# Altium PCB DRV8313EVM.PcbDoc
Units mm, origin at the board's own origin, x right, y up, seen from the top; angles counter-clockwise.
Board outline 56.73 x 32 mm, 2 copper layers (Top Layer, Bottom Layer); 38 components, 35 nets, 159 pads, 138 vias.
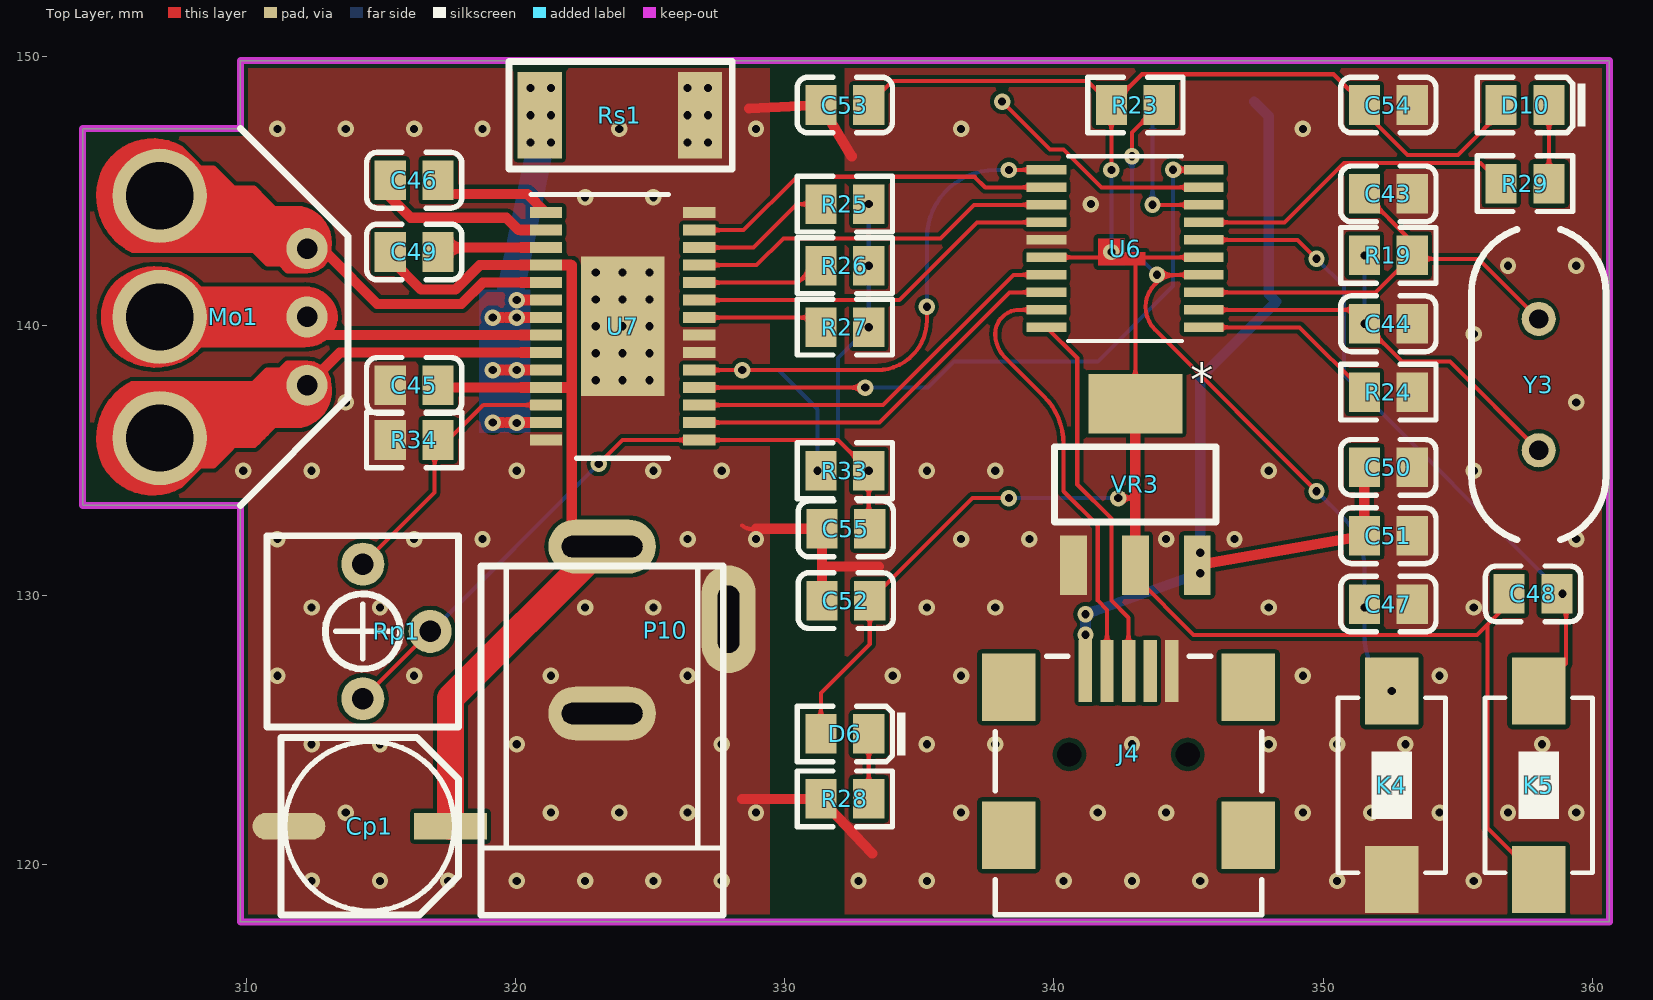
[diagram p0: Top Layer view]
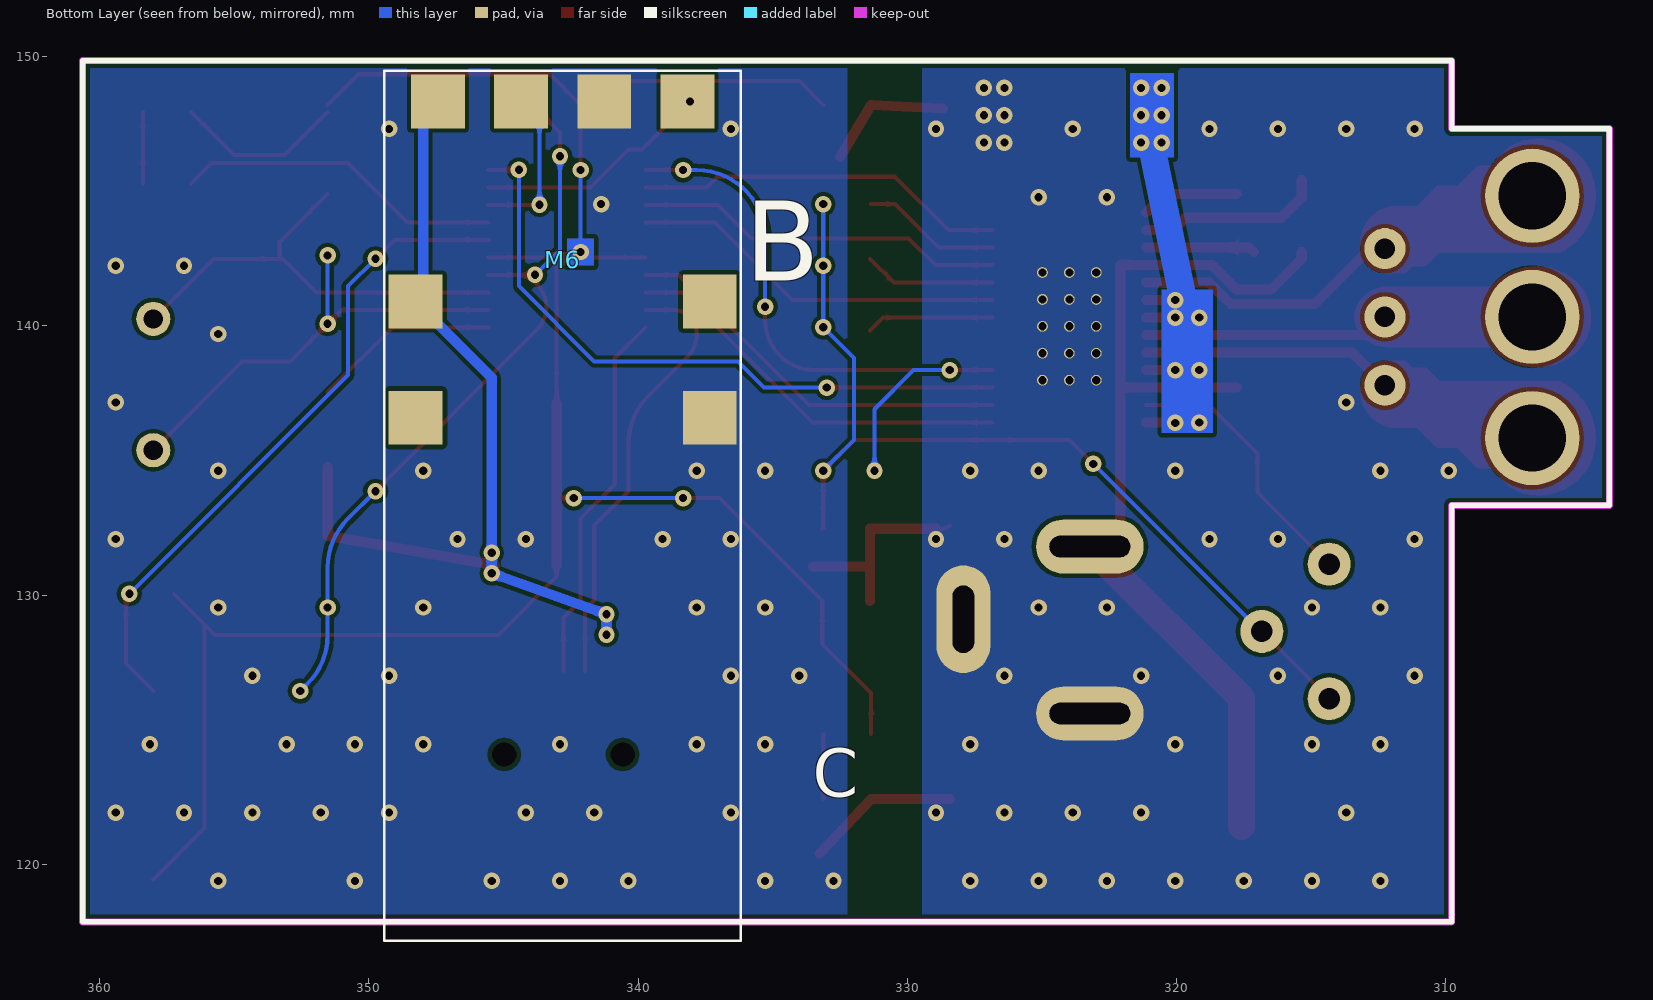
[diagram p1: Bottom Layer view, seen from below]
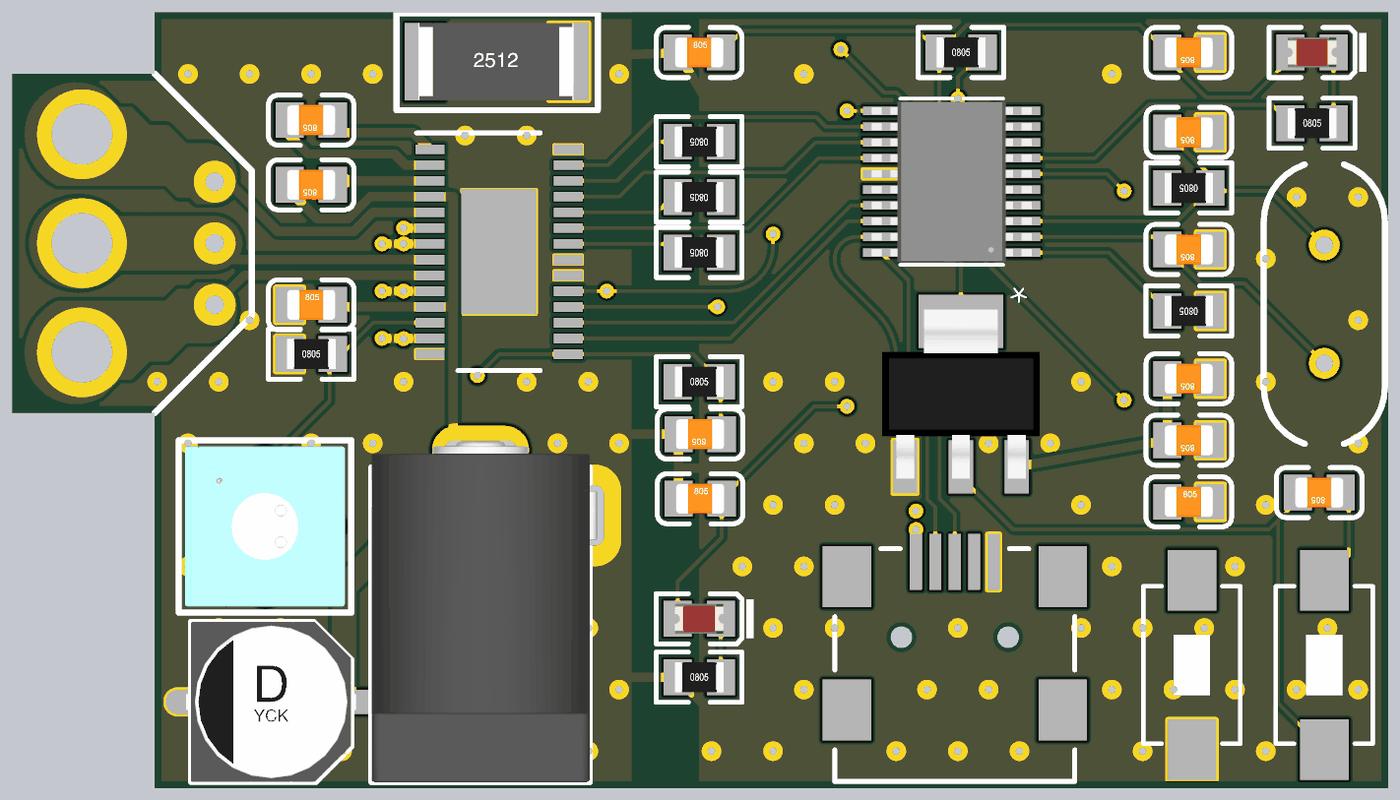
[diagram p2: 3D render of the assembled board from above, using the file's embedded part models]

## Layer stack, top to bottom
Top Solder: solder mask 0.0102, Solder Resist, Dk 3.5
Top Layer: signal copper 0.0356
Dielectric 1: dielectric 0.32, FR-4, Dk 4.8
Bottom Layer: signal copper 0.0356
Bottom Solder: solder mask 0.0102, Solder Resist, Dk 3.5

## Board outline
303.911,133.335 303.911,147.335 309.777,147.335 309.777,149.86 360.64,149.86 360.64,117.856 309.777,117.856 309.777,133.335

## Design rules (kind name [scope] priority, off if disabled: settings)
Clearance [All] p1: gap=0.152 ignorepadtopadclearanceinfootprint=FALSE
HoleSize [All] p1: absolutevalues=TRUE maxlimit=6 minlimit=0.305 maxpercent=80.000 minpercent=20.000
HoleToHoleClearance [All] p1: gap=0.152 allowstackedmicrovias=TRUE
MinimumSolderMaskSliver [All] p1: minsoldermaskwidth=0
PolygonConnect [All] p1: connectstyle=Direct reliefconductorwidth=0.254 reliefentries=4 polygonreliefangle="90 Angle" airgapwidth=0.254
RoutingVias [All] p1: holewidth=0.305 width=0.61 viastyle="Through Hole" minholewidth=0.305 minwidth=0.61 maxholewidth=0.711 maxwidth=1.27
SilkToSilkClearance [All] p1: silktosilkclearance=0
SilkToSolderMaskClearance [IsPad] p1: minsilkscreentomaskgap=0 clearancetoexposedcopper=TRUE
SolderMaskExpansion [All] p1: expansion=0.102
Width [All] p1: maxlimit=254 minlimit=0.152 preferedwidth=0.152
25 further rules are at their usual default settings.

## Components (designator, comment, footprint, x,y, rotation, side; value= is the part's Value field where it differs from the comment)
C43 "9pF" 0805_C 352.425,144.907 r180 top
C44 "9pF" 0805_C 352.425,140.081 r180 top
C45 "10uF" 0805_C 316.23,137.795 r0 top
C46 "10nF" 0805_C 316.23,145.415 r180 top
C47 "100nF" 0805_C 352.425,129.667 r0 top
C48 "100nF" 0805_C 357.803,130.048 r180 top
C49 "100nF" 0805_C 316.23,142.748 r180 top
C50 "100nF" 0805_C 352.425,134.747 r180 top
C51 "10uF" 0805_C 352.425,132.207 r180 top
C52 "10uF" 0805_C 332.269,129.794 r0 top
C53 "100nF" 0805_C 332.232,148.209 r0 top
C54 "100nF" 0805_C 352.425,148.209 r180 top
C55 "470nF" 0805_C 332.269,132.461 r180 top
Cp1 "100u" "CM D(6.3*5.4)" 314.579,121.412 r0 top
D6 "翠绿 0805" 0805_LED_S1 332.232,124.841 r180 top
D10 "红灯 0805" 0805_LED_S1 357.505,148.209 r180 top
J4 "UsbOtg" USB-MINI-A 342.773,124.079 r0 top
K4 "SW" SWITCH 352.552,122.936 r180 top
K5 "SW" SWITCH 358.013,122.936 r180 top
M6 "Pl2303EVM" PI230203EVM 342.86,135.381 r180 bottom locked
Mo1 "Motor3F" Motor_3F 311.277,140.335 r270 top
P10 "Power" DC-005 323.215,125.603 r270 top
R19 "10MΩ" 0805_R 352.425,142.621 r180 top
R23 "100KΩ" 0805_R 343.027,148.209 r0 top
R24 "100KΩ" 0805_R 352.425,137.541 r180 top
R25 "10KΩ" 0805_R 332.232,144.526 r180 top
R26 "10KΩ" 0805_R 332.232,142.24 r180 top
R27 "10KΩ" 0805_R 332.232,139.954 r180 top
R28 "1KΩ" 0805_R 332.232,122.428 r0 top
R29 "1KΩ" 0805_R 357.505,145.288 r0 top
R33 "Pending" 0805_R 332.232,134.62 r0 top
R34 "Pending" 0805_R 316.23,135.763 r0 top
Rp1 "Pending" RP3362P 314.325,128.651 r270 top
Rs1 "0.01R" "R 2512_L" 323.85,147.828 r0 top
U6 "STM32F03xFxP" TSSOP20 342.646,142.875 r180 top locked value=Value
U7 "DRV8313PWPR" PWP0028F_L 323.977,139.986 r0 top value=Value
VR3 "AMS1117-3.3" SOT-223 343.027,134.112 r270 top
Y3 "8MHz" XTAL_US 358.013,140.262 r270 top

## Footprints (in the part's own frame and the unit in brackets; to place one, negate y for a bottom-side part, rotate by r counter-clockwise, add the part's x,y. Pads: shape width x height; smd on the part's side, far side on the other; paste and mask are expansions set on the pad)
0805_C [mm]
  rect 1.16x1.47 smd: 1(-0.89,0) 2(0.89,0)
  silkscreen extent -1.77,-1.04 1.77,1.04, body extent -1,-0.62 1,0.63, height 0.77
0805_LED_S1 [mm]
  rect 1.16x1.47 smd: A(0.89,0) K(-0.89,0)
  silkscreen extent -2.25,-1.03 1.77,1.03, body extent -1.01,-0.62 1.01,0.62, height 1.1
0805_R [mm]
  rect 1.16x1.47 smd: 1(-0.89,0) 2(0.89,0)
  silkscreen extent -1.77,-1.03 1.77,1.03, body extent -1,-0.62 1,0.63, height 0.49
"CM D(6.3*5.4)" [mm] "贴片电解电容，直径6.3mm，高5.4mm"
  rect 2.7x1 smd: 1(3,0)
  oval 2.7x1 smd: 2(-3,0)
  silkscreen extent -3.3,-3.3 3.3,3.3, body extent -3.5,-3.3 3.5,3.3, height 5.4
DC-005 [mm] "5.5*2.1mm，DC30V,2.5A"
  oval 2x4 hole 0.8 slot 3 at 90 deg: 1(-6.2,0) 2(0,0)
  oval 4x2 hole 0.8 slot 2.5 at 0 deg: 2(-3.5,4.7)
  silkscreen extent -5.48,-4.5 7.5,4.5, body extent -6.55,-4.5 7.5,4.8, height 11.2
Motor_3F [mm]
  round 3.5 hole 2.5: 1(-4.5,-4.5) 2(0,-4.5) 3(4.5,-4.5)
  round 1.524 hole 0.762: 1(-2.54,0.975) 2(0,0.975) 3(2.538,0.975)
  Top Layer drawing of 741 lines, arcs and shapes, not listed
  Keep-Out Layer lines w0.254: 7,-1.5 7,-7.366 -7,-7.366 -7,-1.5
  silkscreen extent -7,-1.5 7,2.5
PI230203EVM [mm]
  rect 2x2 smd: 0(-5.405,1.206) 0(5.52,5.524) 1(-5.405,5.524) 1(-4.578,12.955) 2(1.603,12.955) 2(5.52,1.206) 3(4.693,12.955) 4(-1.488,12.955)
  Top Overlay keep-out lines w0.102: 6.675,-18.225 6.675,14.1 -6.575,14.1 -6.575,-18.225 6.675,-18.225
  silkscreen extent -6.58,-18.22 6.67,14.1, body extent -6,-18.28 6.12,13.62, height 1
PWP0028F_L [mm]
  rect 1.2x0.4 smd paste+0 mask+0.051: 1(-2.85,4.225) 2(-2.85,3.575) 3(-2.85,2.925) 4(-2.85,2.275) 5(-2.85,1.625) 6(-2.85,0.975) 7(-2.85,0.325) 8(-2.85,-0.325) 9(-2.85,-0.975) 10(-2.85,-1.625) 11(-2.85,-2.275) 12(-2.85,-2.925) 13(-2.85,-3.575) 14(-2.85,-4.225) 15(2.85,-4.225) 16(2.85,-3.575) 17(2.85,-2.925) 18(2.85,-2.275) 19(2.85,-1.625) 20(2.85,-0.975) 21(2.85,-0.325) 22(2.85,0.325) 23(2.85,0.975) 24(2.85,1.625) 25(2.85,2.275) 26(2.85,2.925) 27(2.85,3.575) 28(2.85,4.225)
  rect 3.1x5.18 smd paste+0 mask+0.051: 29(0,0)
  round 0.4 / inner round 1.524 / far side round 0.4 hole 0.305 mask+0.051: V(-1,-2) V(-1,-1) V(-1,0) V(-1,1) V(-1,2) V(0,-2) V(0,-1) V(0,0) V(0,1) V(0,2) V(1,-2) V(1,-1) V(1,0) V(1,1) V(1,2)
  silkscreen extent -3.4,-4.9 1.7,4.9, body extent 0,0 0.25,0.25, height 0.25
"R 2512_L" [mm] "1W贴片电阻"
  rect 1.65x3.2 smd: 1(-2.95,0) 2(3,0)
  silkscreen extent -4.1,-2 4.2,2, body extent -3.2,-1.6 3.2,1.6, height 0.55
RP3362P [mm]
  round 1.6 hole 0.8: 1(-2.5,0) 2(0,2.5) 3(2.5,0)
  silkscreen extent -3.56,-3.56 3.56,3.56, body extent -3.3,-3.3 3.3,3.3, height 4.74
SOT-223 [mm]
  rect 2.2x1 smd: 1(3,-2.3) 2(3,0) 3(3,2.3)
  rect 2.2x3.5 smd: 2(-3,0)
  silkscreen extent -1.4,-3 1.4,3, body extent -3.49,-3.24 3.49,3.24, height 1.64
SWITCH [mm]
  rect 2x2.5 smd: 1(0,3.5) 2(0,-3.5)
  silkscreen extent -2,-3.25 2,3.25, body extent -2.03,-3.23 2.03,3.25, height 1.2
TSSOP20 [mil]
  rect 58x14 smd: 1(-115,115.16) 2(-115,89.57) 3(-115,63.98) 4(-115,38.39) 5(-115,12.8) 6(-115,-12.8) 7(-115,-38.39) 8(-115,-63.98) 9(-115,-89.57) 10(-115,-115.16) 11(115,-115.16) 12(115,-89.57) 13(115,-63.98) 14(115,-38.39) 15(115,-12.8) 16(115,12.8) 17(115,38.39) 18(115,63.98) 19(115,89.57) 20(115,115.16)
  silkscreen extent -83,-135 83,135, body extent -130,-130 130,130, height 47
USB-MINI-A [mm] "MINI型USB，7.9*7.5*4.1mm"
  rect 2x2.5 smd: 0(-4.45,-3) 0(-4.45,2.5) 0(4.45,-3) 0(4.45,2.5)
  rect 0.5x2.3 smd: 1(-1.6,3.108) 2(-0.8,3.108) 3(0,3.108) 4(0.8,3.108) 5(1.6,3.108)
  round 0.6 hole 0.9 unplated: MH1(2.2,0) MH2(-2.2,0)
  silkscreen extent -4.95,-5.95 4.95,3.65, body extent -4.75,-6 4.75,3.7, height 3.95
XTAL_US [mil]
  round 50 hole 28: 1(0,0) 2(192.13,0)
  silkscreen extent -131,-98 323,98

## Part data
C43 C44 C45 C46 C47 C48 C49 C53 C54 C55: library part "0805 10nF (103) 10% 50V", "贴片电容", Package=0805, SuppliersPartNumber=C1710, ComponentLink1Description=供应商链接, ComponentLink1URL=http://www.szlcsc.com/product/details_2062.html, Supplier=LC
C50 C51 C52: library part "0805 10uF (106) 10% 25V", "贴片电容", Package=0805, SuppliersPartNumber=C15850, ComponentLink1Description=供应商链接, ComponentLink1URL=http://www.szlcsc.com/product/details_16532.html, Supplier=LC
Cp1: library part Cp, "Polarized Capacitor (Axial)", LatestRevisionDate=17-Jul-2002, LatestRevisionNote="Re-released for DXP Platform.", PackageDescription="Polarized Capacitor; 2 Leads", PackageReference=POLAR0.8, Published=8-Jun-2000, Publisher="Altium Limited"
D6: library part "0805 翠绿", "发光二极管", Package=0805, SuppliersPartNumber=C2297, ComponentLink1Description=供应商链接, ComponentLink1URL=http://www.szlcsc.com/product/details_2670.html, Supplier=LC
D10: library part "0805 红灯", "发光二极管", Package=0805, SuppliersPartNumber=C2295, ComponentLink1Description=供应商链接, ComponentLink1URL=http://www.szlcsc.com/product/details_2668.html, Supplier=LC
K4 K5: "Switch"
R19 R23 R24 R25 R26 R27 R28 R29 R33 R34: library part "0805 10KΩ (1002) 1%", "贴片电阻", Package=0805, SuppliersPartNumber=C17414, ComponentLink1Description=供应商链接, ComponentLink1URL=http://www.szlcsc.com/product/details_18102.html, Supplier=LC
Rp1: library part Rp, "Potentiometer", LatestRevisionDate=17-Jul-2002, LatestRevisionNote="Re-released for DXP Platform.", PackageDescription="Variable Resistor, Thru-Hole; 3 Leads", PackageReference=VR5, Published=8-Jun-2000, Publisher="Altium Limited", Set Position=0.5, Sim Note="Enter the Resistance value and the set point into parameter fields."
Rs1: library part Rs
U6: "Mcu", Manufacturer_Part_Number=stm32f03xfxp, C="Copyright (C) 2016 Accelerated Designs. All rights reserved", Copyright="Copyright (C) 2016 Accelerated Designs. All rights reserved", RefDes=RefDes, Type=Type, Vendor=STMicroelectronics
U7: "Imported", Manufacturer="Texas Instruments", PartNumber=DRV8313PWPR, RefDes=RefDes, Type=TYPE
VR3: library part "SOT-223 AMS1117-3.3", "低压差线性稳压(LDO)", Package=SOT-223, SuppliersPartNumber=C6186, ComponentLink1Description=供应商链接, ComponentLink1URL=http://www.szlcsc.com/product/details_6652.html, Supplier=LC
Y3: library part XTAL, "Crystal Oscillator", LatestRevisionDate=17-Jul-2002, LatestRevisionNote="Re-released for DXP Platform.", Published=8-Jun-2000, Publisher="Altium Limited"

## Via types
v1: diameter 0.61, hole 0.305, Top Layer to Bottom Layer, 138 vias

## Nets (pads, with @x,y where several pads share a name; then routed paths per layer and width w, separated by ;. In a path a pad name is that pad's centre, name@x,y a point inside that pad or via, vN(x,y) a via of type N, cw(c..) or ccw(c..) an arc to the next point about the centre after c; other vN are vias at no path point)
A1: R29.1 U6.7 | length 12.3
  Top Layer w0.152: U6.7 348.574,143.85 350.774,146.05 355.853,146.05 R29.1
A4: U6.10 U7.18 | length 24.6
  Top Layer w0.152: U7.18 v1(332.994,137.711) ; v1(344.428,145.8) U6.10
  Bottom Layer w0.152: v1(332.994,137.711) 335.323,137.711 336.296,138.684 341.63,138.684 344.428,141.482 v1(344.428,145.8)
A5: R33.1 U6.11 U7.19 | length 24.1
  Top Layer w0.152: U7.19 v1(328.422,138.361) 333.433,138.361 ccw(c333.433,140.208) 334.046,138.466 ccw(c333.433,140.208) 335.175,139.595 ccw(c333.433,140.208) 335.28,140.208 v1(335.28,140.716) ; v1(338.328,145.796) 338.332,145.8 U6.11
  Bottom Layer w0.152: v1(328.422,138.361) 329.761,138.361 331.216,136.906 v1(331.216,134.62) ; v1(335.28,140.716) 335.28,143.256 cw(c337.82,143.256) 337.82,145.796 v1(338.328,145.796)
A9: U6.17 U7.17 | length 14.9
  Top Layer w0.152: U7.17 333.657,137.061 338.496,141.9 U6.17
A10: U6.18 U7.16 | length 14.9
  Top Layer w0.152: U7.16 333.515,136.411 338.354,141.25 U6.18
GND: C43.1 C44.1 C45.1 C47.2 C50.1 C51.1 C52.1 C53.1 C54.1 C55.2 Cp1.2 J4.5 K4.1 M6.2 P10.2 R24.1 R28.1 R34.1 Rs1.2 U6.15 U7.14 U7.20 U7.21 U7.28 U7.29 U7.V VR3.1 | length 18.4
  Top Layer w0.152: 328.422,132.588 ccw(c328.729,132.895) 328.729,132.461 328.93,132.461
  Top Layer w0.381: 328.422,122.428 R28.1 333.248,120.396 ; 328.676,148.082 C53.1 332.486,146.304 ; 328.93,132.461 C55.2 331.379,131.064 ; C52.1 331.379,131.064 ; 333.502,131.064 331.379,131.064
  other v1: 312.42,119.38 314.96,119.38 317.5,119.38 320.04,119.38 322.58,119.38 325.12,119.38 327.66,119.38 332.74,119.38 335.28,119.38 340.36,119.38 342.9,119.38 345.44,119.38 350.52,119.38 355.6,119.38 313.69,121.92 321.31,121.92 323.85,121.92 326.39,121.92 328.93,121.92 336.55,121.92 341.63,121.92 344.17,121.92 349.25,121.92 351.79,121.92 354.33,121.92 356.87,121.92 359.41,121.92 312.42,124.46 314.96,124.46 320.04,124.46 327.66,124.46 335.28,124.46 337.82,124.46 342.9,124.46 347.98,124.46 350.52,124.46 353.06,124.46 358.14,124.46 311.15,127 316.23,127 321.31,127 326.39,127 334.01,127 336.55,127 349.25,127 354.33,127 312.42,129.54 314.96,129.54 322.58,129.54 325.12,129.54 335.28,129.54 337.82,129.54 347.98,129.54 355.6,129.54 311.15,132.08 316.23,132.08 318.77,132.08 326.39,132.08 328.93,132.08 336.55,132.08 339.09,132.08 344.17,132.08 346.71,132.08 359.41,132.08 309.88,134.62 312.42,134.62 320.04,134.62 325.12,134.62 327.66,134.62 335.28,134.62 337.82,134.62 347.98,134.62 355.6,134.62 313.69,137.16 359.41,137.16 355.6,139.7 356.87,142.24 359.41,142.24 341.376,144.526 322.58,144.78 325.12,144.78 326.39,146.812 327.152,146.812 311.15,147.32 313.69,147.32 316.23,147.32 318.77,147.32 323.85,147.32 328.93,147.32 336.55,147.32 349.25,147.32 326.39,147.828 327.152,147.828 326.39,148.844 327.152,148.844
NetC43_2: C43.2 R19.1 U6.3 Y3.1 | length 16.9
  Top Layer w0.152: U6.3 351.944,141.25 353.188,142.494 355.781,142.494 Y3.1 ; C43.2 353.315,143.127 R19.1
NetC44_2: C44.2 R19.2 U6.2 Y3.2 | length 17.1
  Top Layer w0.152: U6.2 351.016,140.6 v1(351.535,140.081) 352.932,138.684 354.711,138.684 Y3.2
  Bottom Layer w0.152: v1(351.535,140.081) v1(351.535,142.621)
NetC46_1: C46.1 U7.1 | length 3.7
  Top Layer w0.381: 317.755,144.907 320.431,144.907 U7.1
NetC46_2: C46.2 U7.2 | length 6.9
  Top Layer w0.381: C46.2 315.34,144.781 316.103,144.018 319.659,144.018 320.116,143.561 U7.2
NetC49_1: C49.1 U7.3 | length 4.1
  Top Layer w0.381: C49.1 317.283,142.911 U7.3
NetD6_K: D6.K R28.2 | length 2.4
  Top Layer w0.152: R28.2 D6.K
NetD10_K: D10.K R29.2 | length 2.7
  Top Layer w0.152: R29.2 D10.K@358.395,147.955
NetR24_2: R24.2 U6.1 | length 7
  Top Layer w0.152: U6.1 349.126,139.95 R24.2
NetR25_2: R25.2 U7.26 | length 5.2
  Top Layer w0.152: U7.26 328.839,142.911 330.454,144.526 R25.2
NetR26_2: R26.2 U7.24 | length 4.9
  Top Layer w0.152: U7.24 330.496,141.611 R26.2@331.379,142.494
NetR27_2: R27.2 U7.22 | length 4.8
  Top Layer w0.152: U7.22 330.895,140.311 R27.2@331.379,139.827
NetR34_2: R34.2 Rp1.1 U7.12 | length 10.1
  Top Layer w0.152: Rp1.1 316.992,133.818 316.992,135.255 318.798,137.061 U7.12
O1: Mo1.1 U7.5 | length 9.2
  Top Layer w0.381: 313.034,142.642 314.858,140.818 317.983,140.818 318.776,141.611 U7.5
O2: Mo1.2 U7.8 | length 9.2
  Top Layer w0.381: Mo1.2@312.252,140.335 312.926,139.661 312.982,139.661 U7.8
O3: Mo1.3 U7.9 | length 9.4
  Top Layer w0.381: Mo1.3@312.252,137.797 312.811,138.356 313.466,139.011 U7.9
Rs: Rs1.1 U7.6 U7.7 U7.10 U7.13 | length 14.5
  Top Layer w0.381: v1(319.151,136.411) U7.13 ; v1(319.151,138.361) v1(320.04,138.361) U7.10 ; v1(319.151,140.311) v1(320.04,140.311) U7.7 ; v1(320.04,140.961) U7.6
  Bottom Layer w1.016: 319.532,139.954 319.587,140.221 319.624,140.397 319.716,140.844 319.753,141.02 320.934,146.732 320.966,146.883 321.056,147.32
  other v1: 320.04,136.398 320.548,146.812 321.31,146.812 320.548,147.828 321.31,147.828 320.548,148.844 321.31,148.844
Rst: C47.1 K4.2 R23.2 U6.4 | length 28.5
  Top Layer w0.152: v1(342.9,146.304) 342.9,147.192 R23.2 ; v1(343.83,141.9) 344.592,141.9 ; U6.4 344.592,141.9 ; v1(349.758,133.858) 343.767,139.849 cw(c344.634,140.716) 343.408,140.716 cw(c344.592,140.716) 344.592,141.9
  Bottom Layer w0.152: v1(342.9,146.304) 342.9,142.83 v1(343.83,141.9) ; v1(349.758,133.858) 350.792,132.824 cw(c348.996,131.028) 351.536,131.028 v1(351.536,129.54) 351.536,128.504 ccw(c354.076,128.504) 352.28,126.708 v1(352.552,126.436)
SWCLK_A14: J4.3 U6.20 | length 14
  Top Layer w0.152: U6.20 340.868,138.807 340.868,134.112 342.138,132.842 342.138,129.794 342.773,129.159 J4.3
SWDIO_A13: J4.2 U6.19 | length 16.5
  Top Layer w0.152: U6.19 338.72,140.6 ccw(c338.72,139.7) 338.411,140.545 ccw(c338.72,139.7) 337.82,139.7 ccw(c339.046,139.7) 338.179,138.833 339.616,137.396 cw(c337.82,135.6) 340.36,135.6 340.36,133.858 341.63,132.588 341.63,129.794 341.973,129.451 J4.2
TIM3_CH1_A6: U6.12 U7.27 | length 13.9
  Top Layer w0.152: U7.27 328.473,143.561 330.454,145.542 337.058,145.542 337.45,145.15 U6.12
TIM3_CH2_A7: U6.13 U7.25 | length 13.8
  Top Layer w0.152: U7.25 328.951,142.261 329.946,143.256 335.788,143.256 337.032,144.5 U6.13
TIM3_CH4_B1: U6.14 U7.23 | length 14.1
  Top Layer w0.152: U7.23 334.255,140.961 337.144,143.85 U6.14
USART1_RX_A3: M6.3 U6.9 | length 8.8
  Top Layer w0.152: v1(338.074,148.336) 339.852,146.558 340.36,146.558 341.768,145.15 U6.9
USART1_TX_A2: M6.4 U6.8 | length 6
  Top Layer w0.152: v1(343.662,144.5) U6.8
  Bottom Layer w0.152: v1(343.662,144.5) 343.662,147.651 M6.4
V3: C55.1 R25.1 R26.1 R27.1 R33.2 Rp1.2 Rp1.3 U7.15 | length 36.3
  Top Layer w0.152: Rp1.3 Rp1.2 ; v1(323.088,134.874) 323.975,135.761 U7.15 331.981,135.761 v1(333.122,134.62) 333.122,132.498 C55.1
  Bottom Layer w0.152: Rp1.2 316.865,128.651 v1(323.088,134.874) ; v1(333.122,134.62) 331.978,135.764 331.978,138.81 v1(333.122,139.954) v1(333.122,142.24) v1(333.122,144.526)
V5: C50.2 C51.2 J4.1 M6.1 VR3.3 | length 33.2
  Top Layer w0.381: VR3.3 345.385,131.122 345.515,131.145 C51.2 C50.2
  Bottom Layer w0.381: v1(341.173,128.524) v1(341.173,129.286) v1(345.44,130.81) v1(345.44,131.572) 345.44,138.08 348.265,140.905 347.98,141.19 347.98,147.794 M6.1@347.438,148.336
VA: C48.2 C52.2 C53.2 C54.2 D6.A D10.A K5.1 R23.1 U6.5 U6.16 VR3.2 | length 92.8
  Top Layer w0.152: D6.A 331.342,126.364 333.159,128.181 C52.2 336.969,133.604 v1(338.328,133.604) ; C53.2 334.011,149.098 341.248,149.098 R23.1 ; U6.16 343.027,142.55 ; v1(342.138,145.796) v1(342.138,145.796) R23.1 ; v1(342.392,133.604) 343.027,133.604 ; VR3.2@343.027,131.112 343.027,130.683 345.186,128.524 355.726,128.524 356.108,128.906 ; VR3.2@343.027,137.112 343.027,142.55 ; U6.5 343.027,142.55 ; C54.2@351.535,147.955 353.135,146.355 355.015,146.355 D10.A@356.615,147.955 ; C54.2 350.392,149.352 343.28,149.352 R23.1 ; C48.2@357.25,130.048 356.108,128.906 ; K5.1 356.108,121.341 356.108,128.906
  Top Layer w0.381: VR3.2@343.027,131.112 343.027,133.604 VR3.2@343.027,137.112
  Bottom Layer w0.152: v1(338.328,133.604) v1(342.392,133.604) ; v1(342.138,142.748) v1(342.138,145.796)
Vin: C45.2 C49.2 Cp1.1 P10.1 U7.4 U7.11 | length 36.5
  Top Layer w0.381: C49.2 315.34,142.495 316.484,141.351 317.754,141.351 318.664,142.261 U7.4 322.084,142.261 322.084,137.711 ; 317.755,137.711 U7.11 322.084,137.711 ; P10.1 322.084,131.803 322.084,137.711
  Top Layer w1.016: Cp1.1 317.579,126.167 P10.1
WKUP_A0: C48.1 K5.2 U6.6 | length 24.8
  Top Layer w0.152: U6.6 349.052,143.2 v1(349.758,142.494) ; K5.2 359.03,127.453 C48.1@359.03,130.048
  Bottom Layer w0.152: v1(349.758,142.494) 350.774,141.478 350.774,138.176 v1(358.902,130.048)
pads on no net: J4.0 J4.4 J4.MH1 J4.MH2 M6.0

## Polygon pours and split planes (outlines as drawn)
no net on Bottom Overlay (none): 303.911,133.335 303.911,147.335 309.777,147.335 309.777,149.86 360.64,149.86 360.64,117.856 309.777,117.856 309.777,133.335
GND on Bottom Layer "GND_L02_P002" (solid, pour order 2): 332.232,149.86 360.64,149.86 360.64,117.856 332.232,117.856
GND on Bottom Layer "GND_L02_P000" (solid, pour order 0): 303.911,147.335 309.777,147.335 309.777,149.836 329.38,149.836 ccw(c329.38,149.918) 329.438,149.86 329.438,117.856 309.777,117.856 309.777,133.335 303.911,133.335
GND on Top Layer "GND_L01_P006" (solid, pour order 6): 332.232,149.86 360.64,149.86 360.64,117.856 332.232,117.856
GND on Top Layer "GND_L01_P004" (solid, pour order 4): 303.911,147.335 309.777,147.335 309.777,149.836 329.438,149.836 329.438,117.856 309.777,117.856 309.777,133.335 303.911,133.335

## Keep-outs
Keep-Out Layer:
  lines w0.254: 309.777,133.335 309.777,117.856 360.64,117.856 360.64,149.86 309.777,149.86 ; 309.777,147.335 309.777,149.836

## Other copper
Top Layer:
  rectangle: 309.777,149.836 329.438,149.86
  rectangle net VA: 341.63,142.24 342.646,143.256
  rectangle net VA: 342.646,142.24 343.408,142.748
Bottom Layer:
  rectangle net VA: 341.63,142.24 342.646,143.256
  rectangle net Rs: 320.091,146.253 321.716,149.403
  rectangle net Rs: 318.643,136.017 320.548,141.351

## Silkscreen, mask and mechanical layers (free items; w line width, h text height)
Bottom Overlay:
  text "B" at 336.042,140.716 h5.08
  text "C" at 333.502,121.92 h3.05

## Text inside footprints (layer, text, board x,y; h text height)
U6: Top Overlay "*" at 345.948,139.192 h1.27 r180